# Altium PCB pcb_flashlight.PcbDoc
Units mil, origin at the board's own origin, x right, y up, seen from the top; angles counter-clockwise.
Board outline 2066.93 x 1968.5 mil, 2 copper layers (Top Layer, Bottom Layer); 20 components, 11 nets, 59 pads, 4 vias.
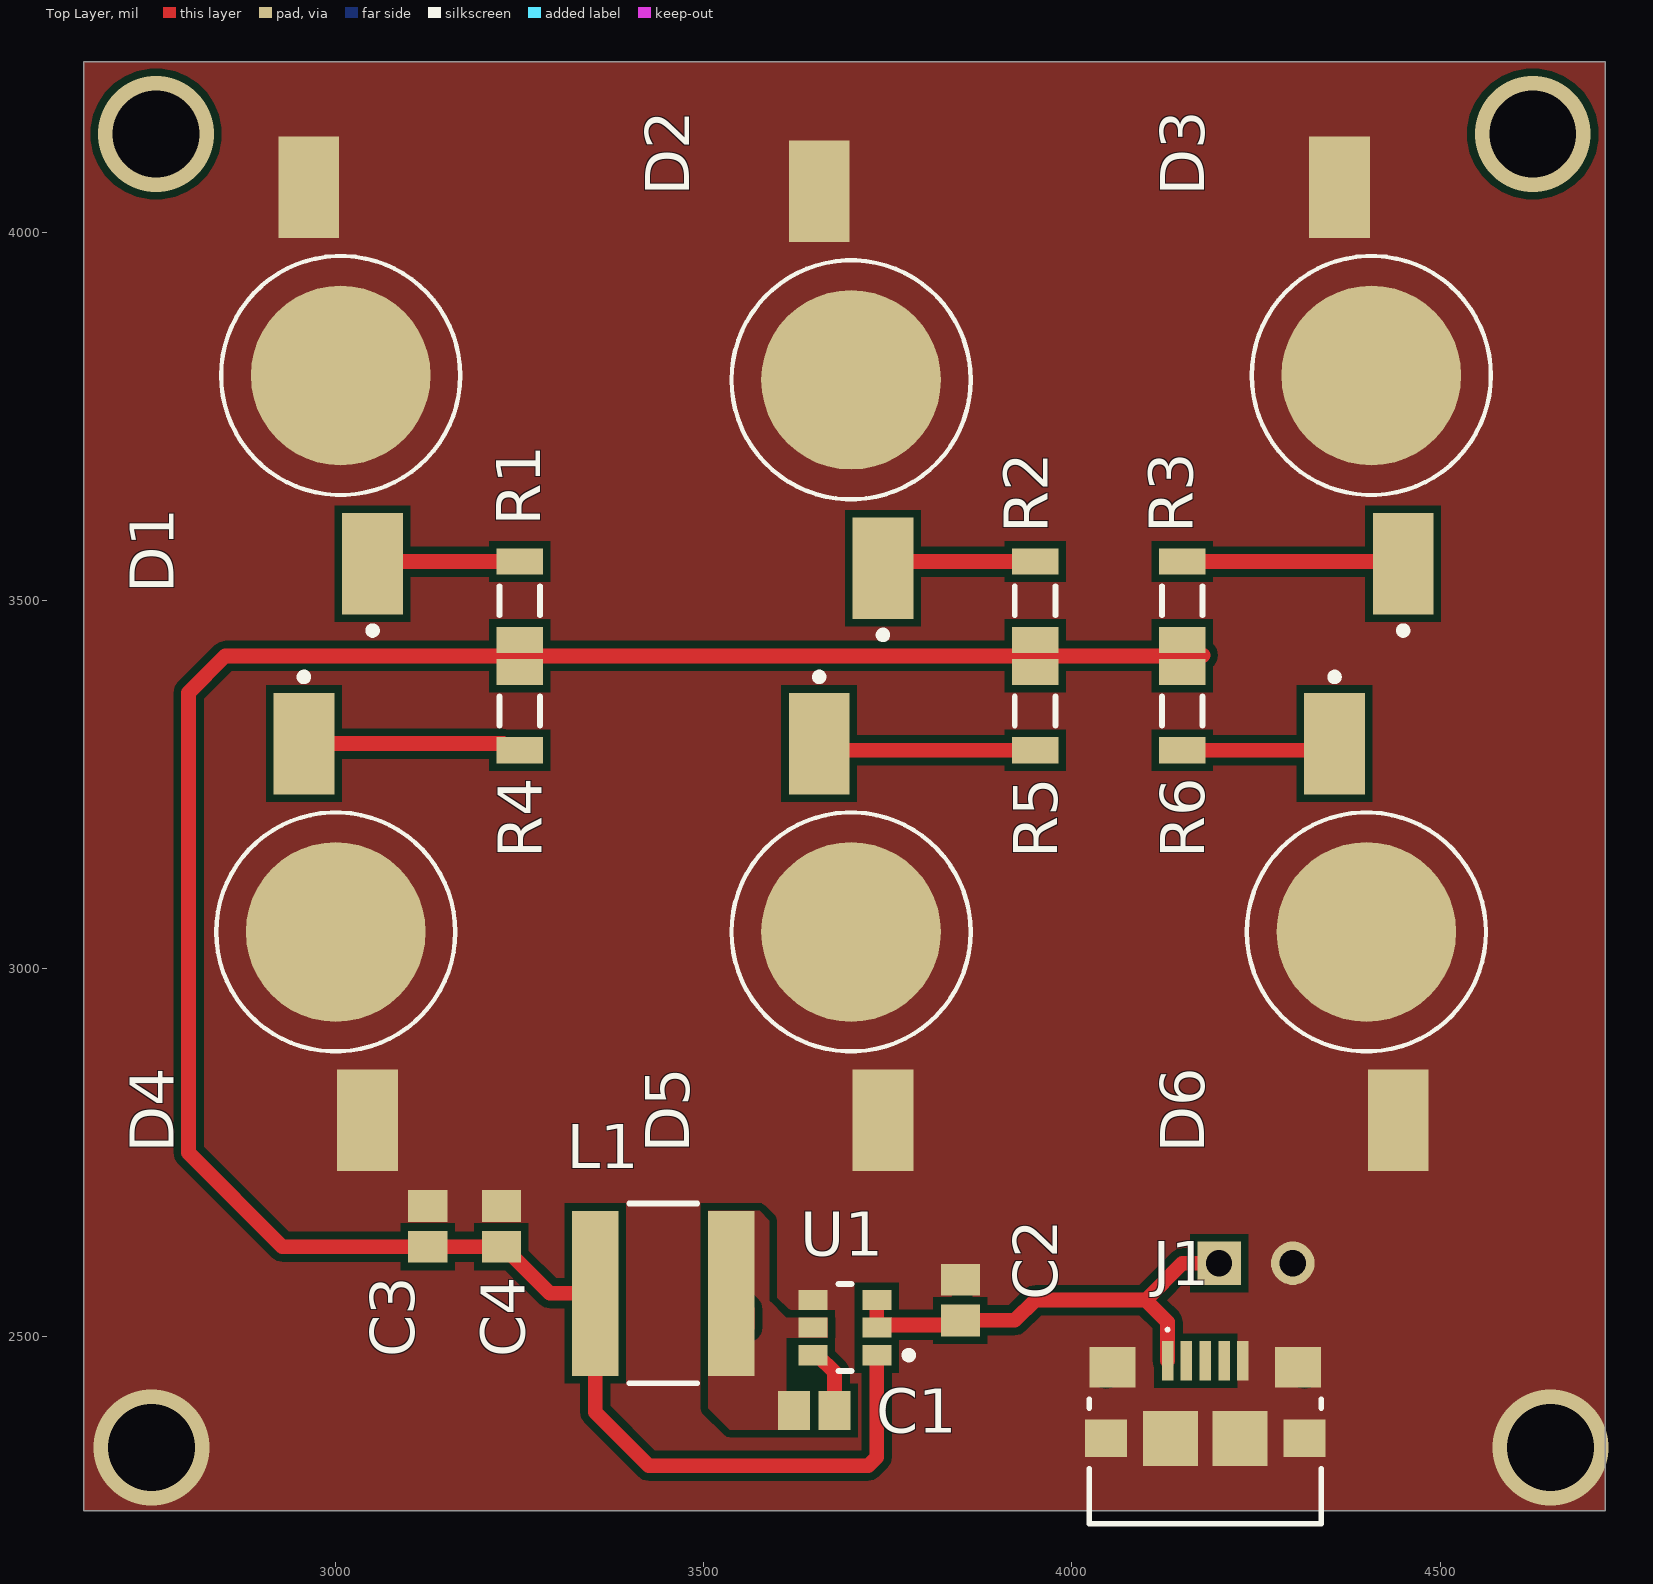
[diagram p0: Top Layer view]
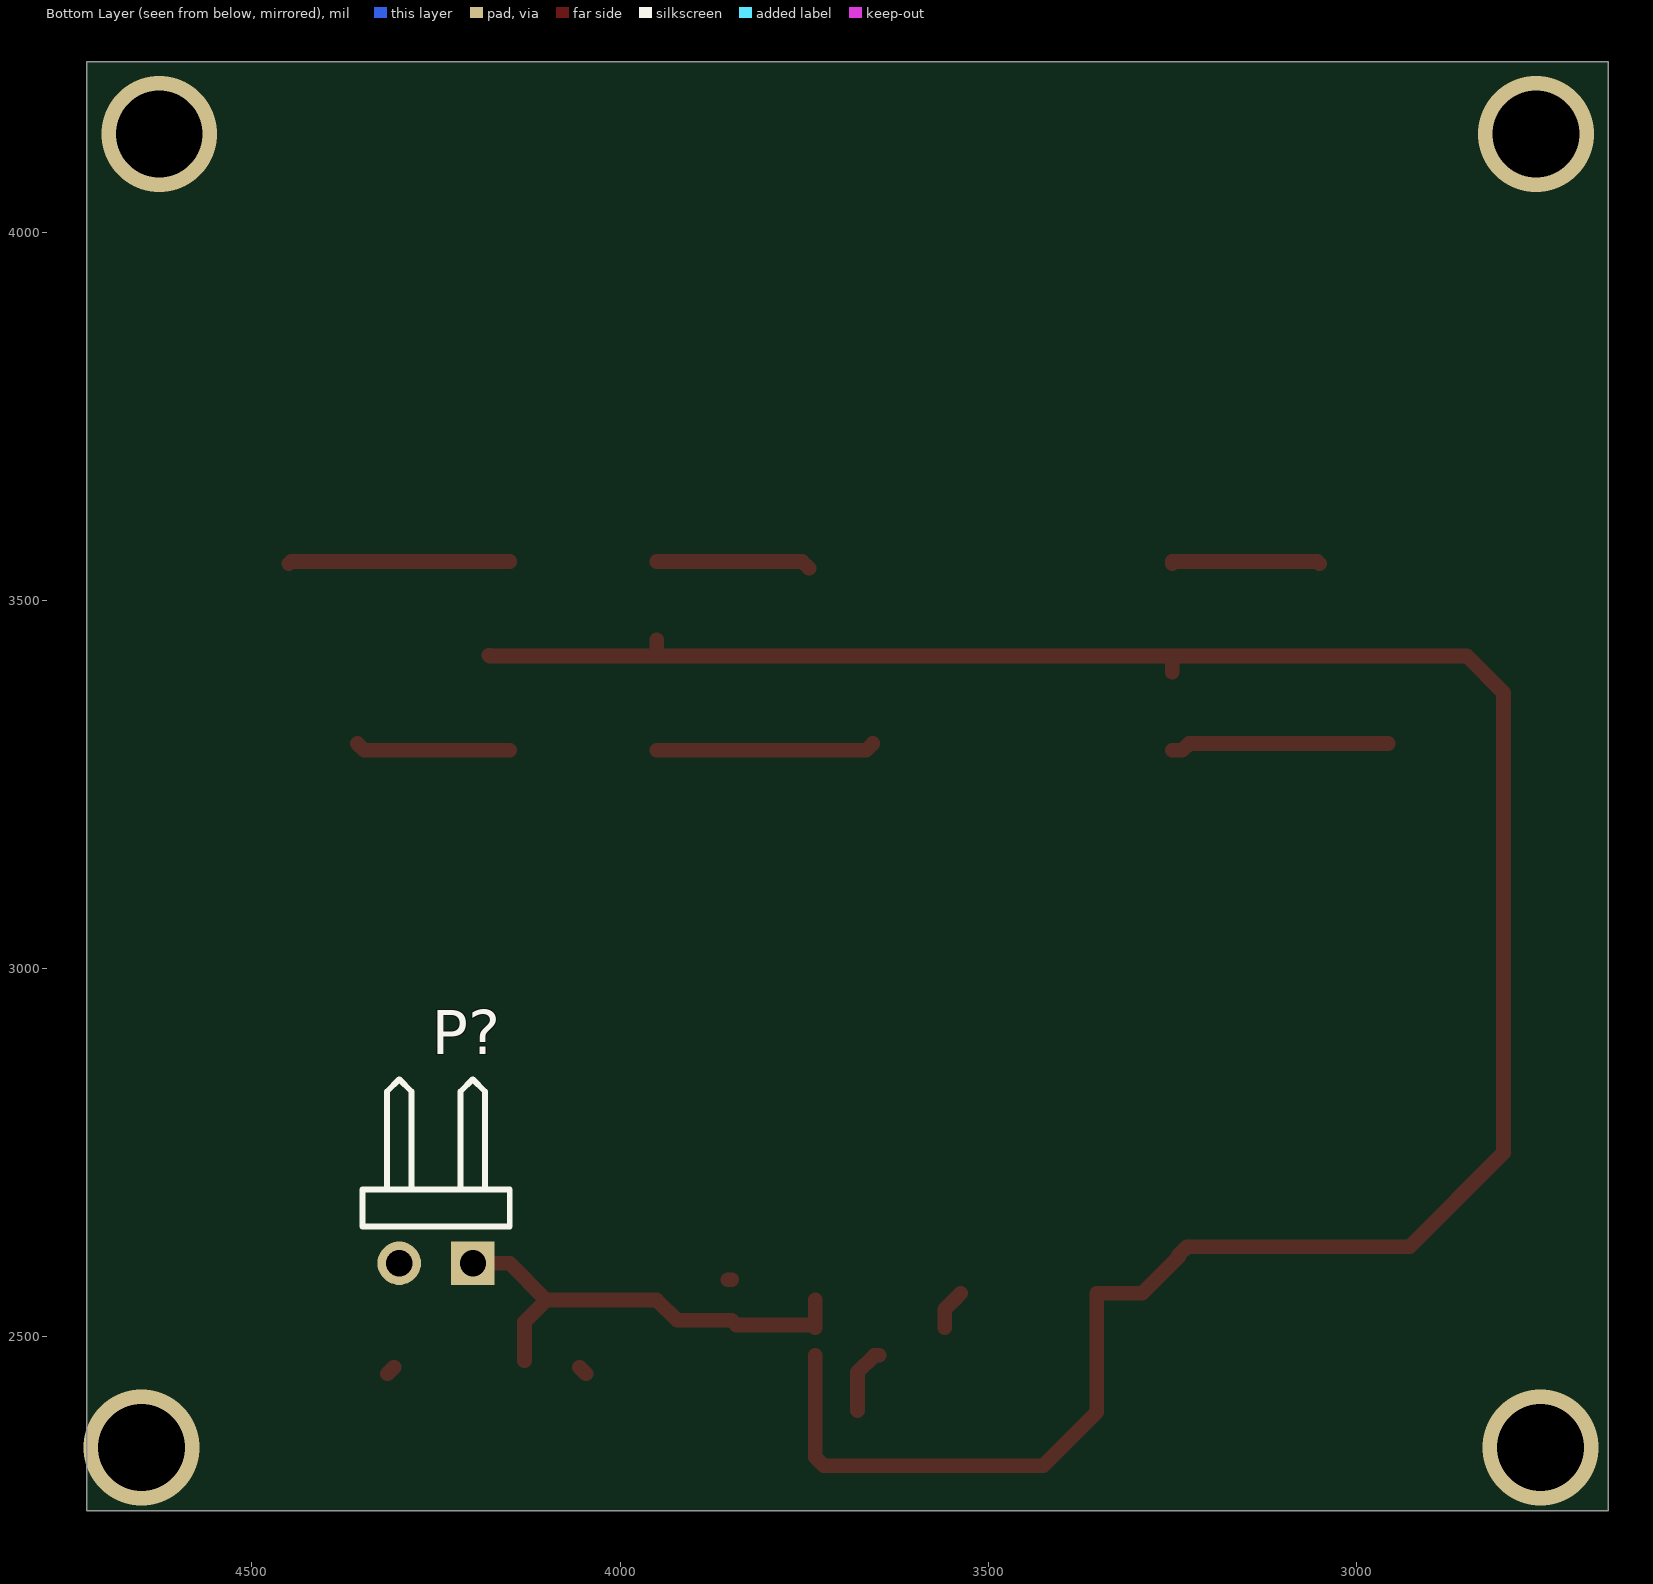
[diagram p1: Bottom Layer view, seen from below]

## Layer stack, top to bottom
Top Solder: solder mask 0.4, Solder Resist, Dk 3.5
Top Layer: signal copper 1.4
Dielectric 1: dielectric 12.6, FR-4, Dk 4.8
Bottom Layer: signal copper 1.4
Bottom Solder: solder mask 0.4, Solder Resist, Dk 3.5

## Board outline
2657.48,4232.28 4724.41,4232.28 4724.41,2263.78 2657.48,2263.78

## Design rules (kind name [scope] priority, off if disabled: settings)
Clearance [All] p1: gap=10 ignorepadtopadclearanceinfootprint=FALSE except(0: Arc-Hole Track-Hole SMDPad-Hole THPad-Hole Via-Hole Fill-Hole Poly-Hole Region-Hole Text-Hole; 20: Fill-Text Poly-Text Region-Text)
PlaneClearance [All] p1: clearance=30
PlaneConnect [All] p1: pad.planeconnectstyle=Direct pad.reliefexpansion=20 pad.reliefentries=4 pad.reliefconductorwidth=10 pad.reliefairgap=10 via.planeconnectstyle=Relief via.reliefexpansion=20 via.reliefentries=4 via.reliefconductorwidth=10 via.reliefairgap=10
PolygonConnect [All] p1: connectstyle=Direct reliefconductorwidth=10 reliefentries=4 polygonreliefangle="90 Angle" airgapwidth=10
RoomDefinition schematic_flashlight [InComponentClass('schematic_flashlight')] p1: confinementstyle=ConfineIn formatcopy=TRUE lockcomponents=FALSE outline 0,0 2000,0 2000,1000 0,1000
RoutingVias [All] p1: holewidth=28 width=50 viastyle="Through Hole" minholewidth=28 minwidth=50 maxholewidth=28 maxwidth=50
SolderMaskExpansion [All] p1: expansion=4 istentingtop=FALSE
Width [All] p1: maxlimit=40 minlimit=10 preferedwidth=10 bottomlayer_maxwidth=10 minimp=50.000000 maximp=50.000000 favimp=50.000000
28 further rules are at their usual default settings.

## Components (designator, comment, footprint, x,y, rotation, side; value= is the part's Value field where it differs from the comment)
C1 "100nF" CAPC2013X145X50LL20T25 3650,2400 r0 top
C2 "10uF" CAPC2013X145X50LL20T25 3848.43,2550 r270 top
C3 "22uF" CAPC2013X145X50LL20T25 3125,2650 r270 top
C4 "22uF" CAPC2013X145X50LL20T25 3225,2650 r270 top
D1 "SML-LXL8047USBCTR3" FP-SML-LXL8047USBCTR3-MFG 3006.69,3805.91 r90 top
D2 "SML-LXL8047USBCTR3" FP-SML-LXL8047USBCTR3-MFG 3700,3800 r90 top
D3 "SML-LXL8047USBCTR3" FP-SML-LXL8047USBCTR3-MFG 4406.69,3805.91 r90 top
D4 "SML-LXL8047USBCTR3" FP-SML-LXL8047USBCTR3-MFG 3000,3050 r270 top
D5 "SML-LXL8047USBCTR3" FP-SML-LXL8047USBCTR3-MFG 3700,3050 r270 top
D6 "SML-LXL8047USBCTR3" FP-SML-LXL8047USBCTR3-MFG 4400,3050 r270 top
J1 "1981568-1" TECO-1981568-5_V 4181.1,2467.52 r0 top
L1 "4.7uH" FP-NR6028-MFG 3444.88,2559.06 r180 top
P? "Header 2H" HDR1X2H 4200,2600 r0 bottom
R1 "1Ohm" RESC3216X60X45LL10T20 3250,3500 r270 top
R2 "1Ohm" RESC3216X60X45LL10T20 3950,3500 r270 top
R3 "1Ohm" RESC3216X60X45LL10T20 4150,3500 r270 top
R4 "1Ohm" RESC3216X60X45LL10T20 3250,3350 r90 top
R5 "1Ohm" RESC3216X60X45LL10T20 3950,3350 r90 top
R6 "1Ohm" RESC3216X60X45LL10T20 4150,3350 r90 top
U1 "AP63203WU-7" FP-TSOT26-MFG 3691.71,2512.6 r180 top

## Footprints (in the part's own frame and the unit in brackets; to place one, negate y for a bottom-side part, rotate by r counter-clockwise, add the part's x,y. Pads: shape width x height; smd on the part's side, far side on the other; paste and mask are expansions set on the pad)
CAPC2013X145X50LL20T25 [mm] "Chip Capacitor, 2-Leads, Body 2.00x1.25mm, IPC High Density"
  rect 1.1x1.35 smd: 1(-0.7,0) 2(0.7,0)
  body extent -1.1,-0.72 1.1,0.72, height 1.45
FP-NR6028-MFG [mm]
  rect 1.6x5.7 smd paste+0 mask+0: 1(-2.35,0) 2(2.35,0)
  silkscreen extent -1.17,-3.1 1.17,3.1, body extent -3.25,-3.2 3.25,3.2, height 0.25
FP-SML-LXL8047USBCTR3-MFG [mm]
  rect 3.5x2.1 smd paste+0 mask+0: 1(-6.5,-1.1) 2(6.5,1.1)
  round 6.2 smd paste+0 mask+0: 3(0,0)
  silkscreen extent -8.92,-4.13 4.12,4.13, body extent -8.35,-4.23 8.35,4.23, height 0.25
FP-TSOT26-MFG [mm]
  rect 1x0.7 smd paste+0 mask+0: 1(-1.099,0.95) 2(-1.099,0) 3(-1.099,-0.95) 4(1.099,-0.95) 5(1.099,0) 6(1.099,0.95)
  silkscreen extent -2.33,-1.5 0.22,1.5, body extent -1.7,-1.6 1.7,1.6, height 0.25
HDR1X2H [mm] "Connector; Header; 2 Position; Right Angle"
  rect 1.5x1.5 hole 0.9: 1(0,0)
  round 1.5 hole 0.9: 2(2.54,0)
  silkscreen extent -1.27,-6.35 3.81,-1.27
RESC3216X60X45LL10T20 [mm] "Chip Resistor, 2-Leads, Body 3.20x1.60mm, IPC High Density"
  rect 0.9x1.6 smd: 1(-1.35,0) 2(1.35,0)
  silkscreen extent -0.5,-0.7 0.5,0.7, body extent -1.65,-0.85 1.65,0.85, height 0.6
TECO-1981568-5_V [mm] "SMD, 5-Leads, Body 8x5.9mm, Pitch 0.65mm"
  rect 0.4x1.35 smd: 1(-1.3,0) 2(-0.65,0) 3(0,0) 4(0.65,0) 5(1.3,0)
  rect 1.6x1.4 smd: 6(-3.2,-0.225) 7(3.2,-0.225)
  rect 1.45x1.3 smd: 8(-3.425,-2.675) 9(3.425,-2.675)
  rect 1.9x1.9 smd: 10(-1.2,-2.675) 11(1.2,-2.675)
  silkscreen extent -4,-5.63 4,1.12, body extent -4,-5.63 4,0.28, height 3

## Part data
C1 C2 C3 C4: library part CMP-1036-04746-2, Manufacturer=Kemet, Part Number=C0805C105K4PACTU
D1 D2 D3 D4 D5 D6: library part CMP-57192-000008-1, "LED ROUND 3W BLUE 448NM SMD", Case/Package=SMD/SMT, Color=Blue, Current Rating=1.5A, Forward Current=700mA, Forward Voltage=4.6V, Max Operating Temperature=100°C, Max Power Dissipation=3W, Min Operating Temperature=-40°C, Package Quantity=1, Test Temperature=25°C, Approvals=UL, Dominant Wavelength=454nm, Illumination Color=Blue, Lens Color=Blue, Lens Style=Dome, Luminous Flux=20lm, Luminous Intensity=20mcd, Max Current Rating=700mA, Mount="Surface Mount", Number of LEDs=1, Number of Pins=2, Operating Supply Voltage=4.6V, Packaging="Tape and Reel", Power Rating=3W, REACH SVHC="No SVHC", RoHS Compliant=Yes, Series=TitanBrite™, Test Current=700mA, Viewing Angle=100°, Wavelength=454nm
J1: library part CMP-2000-05408-1, "Micro USB Receptacle Standard Type B Assy, 5-Pin SMD, RoHS, Tape and Reel", Current Rating (Max)=1/ContactA, Manufacturer="TE Connectivity", Operating Temp Range=-55Cto85C, Operating Temperature Max Deg. C=85C, Operating Temperature Min Deg. C=-55C, Voltage Rating Max=30VAC, Body Orientation=RightAngle, Contact Material=CopperAlloy, Contact Plating=GoldOverNickel, Datasheet URL=http://www.mouser.com/ds/2/418/NG_CD_1981568_E2-621296.pdf, Datasheet Version="Rev. E2, 08/2015", Gender=RCP, Housing Material=Thermoplastic, Manufacturer URL=http://www.te.com/, Mounting Style=SurfaceMount, Number of Contacts=5POS, Number of Ports=1Port, Number of Terminals=5, Packaging=TapeandReel, Pitch (mm)=0.65mm, Product Depth (mm)=5.6mm, Product Height (mm)=3mm, Product Length (mm)=8mm, Termination Method=Solder, Type=MicroUSB
L1: library part CMP-14484-000406-1, "SMD Power Inductors 10uH ±20% 1.9A 84.5mΩ", Case/Package=2424, Current Rating=1.9A, DC Resistance (DCR)=84.5mR, Inductance=10uH, Inductance Tolerance=20%, Max Operating Temperature=120°C, Min Operating Temperature=-25°C, Package Quantity=2000, Resistor Type=Wirewound, Self Resonant Frequency=20MHz, Test Frequency=100kHz, Core Material=Ferrite, Halogen Free="Halogen Free", Height=2.8mm, Height - Seated (Max)=0.11inch, Lead Free="Lead Free", Length=0.236inch, Max DC Current=1.9A, Mount="Surface Mount", Number of Pins=2, Packaging="Tape and Reel", RMS Current (Irms)=1.9A, RoHS Compliant=Yes, Saturation Current=1.9A, Series=NR, Shielding=Shielded, Termination=SMD/SMT, Tolerance=20%, Width=6mm
P?: "Header, 2-Pin, Right Angle", LatestRevisionDate=17-Jul-2002, LatestRevisionNote="Re-released for DXP Platform.", Publisher="Altium Limited"
R1 R2 R3 R4 R5 R6: library part CMP-2003-01921-1, Manufacturer="Vishay Dale", Part Number=CRCW12061R00FNEA
U1: library part CMP-12757-000006-1, "IC REG BUCK 3.3V 2A TSOT26", Ambient Temperature Range High=+85°C, Ambient Temperature Range Low=-40°C, Manufacturer="Diodes Inc.", Max Junction Temp=+160°C, Max Supply Voltage=32V, Min Supply Voltage=3.8V, Nominal Supply Current=22uA, Output Current=2A, Output Voltage=3.3V, Package=TSOT26, Switching Frequency=1.1MHz, Temperature="to +160°C", Automotive=No, Category=IC, ComponentLink2Description=Datasheet, ComponentLink2URL=https://www.diodes.com/assets/Datasheets/AP63200-AP63201-AP63203-AP63205.pdf, Device Class L1="Integrated Circuits (ICs)", Device Class L2="Power Management ICs", Device Class L3="Voltage Regulators - Switching", Digikey Description="IC REG BUCK 3.3V 2A TSOT26", Footprint Url=https://www.diodes.com/assets/Package-Files/TSOT26.pdf, Height=1mm, Lead Free=Yes, Manufacturer Part Number=AP63203WU-7, Mouser Description="AP63203 Series 3.3 V 2 A SMT Fixed Low IQ Synchronous Buck - TSOT-26", Number Of Outputs=1, Octopart=https://octopart.com/ap63203wu-7-diodes+inc.-98099550, Output Type=Fixed, RoHS=TRUE, Standoff Height=0.01mm, Switching Topology=Buck, Temperature Range High=+160°C

## Via types
v1: diameter 157.48, hole 118.11, Top Layer to Bottom Layer, 4 vias

## Nets (pads, with @x,y where several pads share a name; then routed paths per layer and width w, separated by ;. In a path a pad name is that pad's centre, name@x,y a point inside that pad or via, vN(x,y) a via of type N, cw(c..) or ccw(c..) an arc to the next point about the centre after c; other vN are vias at no path point)
3.3V: C3.2 C4.2 L1.2 R1.2 R2.2 R3.2 R4.2 R5.2 R6.2 U1.1 | length 3418.7
  Top Layer w20: R4.2 3250,3425 ; U1.1 3735,2336.72 3723.28,2325 3425,2325 3352.36,2397.64 L1.2 3290.87,2559.06 3241.57,2608.35 3241.57,2610.79 3229.92,2622.44 C4.2 C3.2 2927.56,2622.44 2800,2750 2800,3375 2850,3425 3250,3425 ; R2.2 3950,3425 ; 4177.5,3426 4178,3426 4177,3425 3950,3425 ; 3250,3425 3950,3425
5V: C2.2 J1.1 P?.1 U1.2 U1.3 | length 633.5
  Top Layer w20: U1.3 U1.2 3738.62,2516.22 3842.2,2516.22 C2.2 3922.44,2522.44 3950,2550 4100,2550 ; J1.1 4129.92,2520.08 4100,2550 ; P?.1 4150,2600 4100,2550
GND: C2.1 C3.1 C4.1 D1.2 D1.3 D2.2 D2.3 D3.2 D3.3 D4.2 D4.3 D5.2 D5.3 D6.2 D6.3 J1.5 J1.6 J1.7 J1.8 J1.9 J1.10 J1.11 P?.2 U1.4 | length 30
  Top Layer w20: C2.1 C2.1@3853.35,2577.56 ; J1.6@4046.26,2449.8 J1.6 ; J1.7 J1.7@4315.94,2449.8
  other v1: 2750,2350 4650,2350
NetC1_1: C1.1 L1.1 U1.5 | length 68.1
  Top Layer w20: L1.1@3546.43,2550.02 L1.1 3558.9,2537.56 L1.1@3558.9,2512.6
NetC1_2: C1.2 U1.6 | length 90.7
  Top Layer w20: U1.6 3654.33,2475.2 3677.56,2451.97 C1.2
NetD1_1: D1.1 R1.1 | length 204.5
  Top Layer w20: D1.1 3053.15,3553.15 R1.1 R1.1@3250,3550
NetD2_1: D2.1 R2.1 | length 210.4
  Top Layer w20: D2.1 3752.36,3553.15 R2.1
NetD3_1: D3.1 R3.1 | length 301.3
  Top Layer w20: R3.1 4446.85,3553.15 D3.1
NetD4_1: D4.1 R4.1 | length 297.1
  Top Layer w20: D4.1 3227.17,3305.91 3236.22,3296.85 R4.1
NetD5_1: D5.1 R5.1 | length 297.1
  Top Layer w20: D5.1 3665.75,3296.85 R5.1
NetD6_1: D6.1 R6.1 | length 210.4
  Top Layer w20: R6.1 4347.64,3296.85 D6.1
pads on no net: J1.2 J1.3 J1.4
copper on no net:
  other v1: 2755.91,4133.86 4625.98,4133.86

## Polygon pours and split planes (outlines as drawn)
GND on Top Layer "GND_L01_P009" (solid, pour order 9): 2657.48,4232.28 2657.48,2263.78 4724.41,2263.78 4724.41,4232.28
NetC1_1 on Top Layer "NETC1_1_L01_P010" (solid, pour order 10): 3506,2671 3576,2671 3589,2658 3589,2549 3612,2526 3668,2526 3668,2499 3612,2499 3612,2375 3613,2374 3535,2374 3506,2403 3506,2671 3507,2671 3531,2647
NetC1_1 on Top Layer "NETC1_1_L01_P008" (solid, pour order 8): 3506,2671 3576,2671 3589,2658 3589,2549 3612,2526 3668,2526 3668,2499 3612,2499 3612,2375 3613,2374 3535,2374 3506,2403